# Altium PCB Motor_control.PcbDoc
Units mil, origin at the board's own origin, x right, y up, seen from the top; angles counter-clockwise.
Board outline 3543.31 x 3543.31 mil, 2 copper layers (Top Layer, Bottom Layer); 85 components, 65 nets, 315 pads, 62 vias.
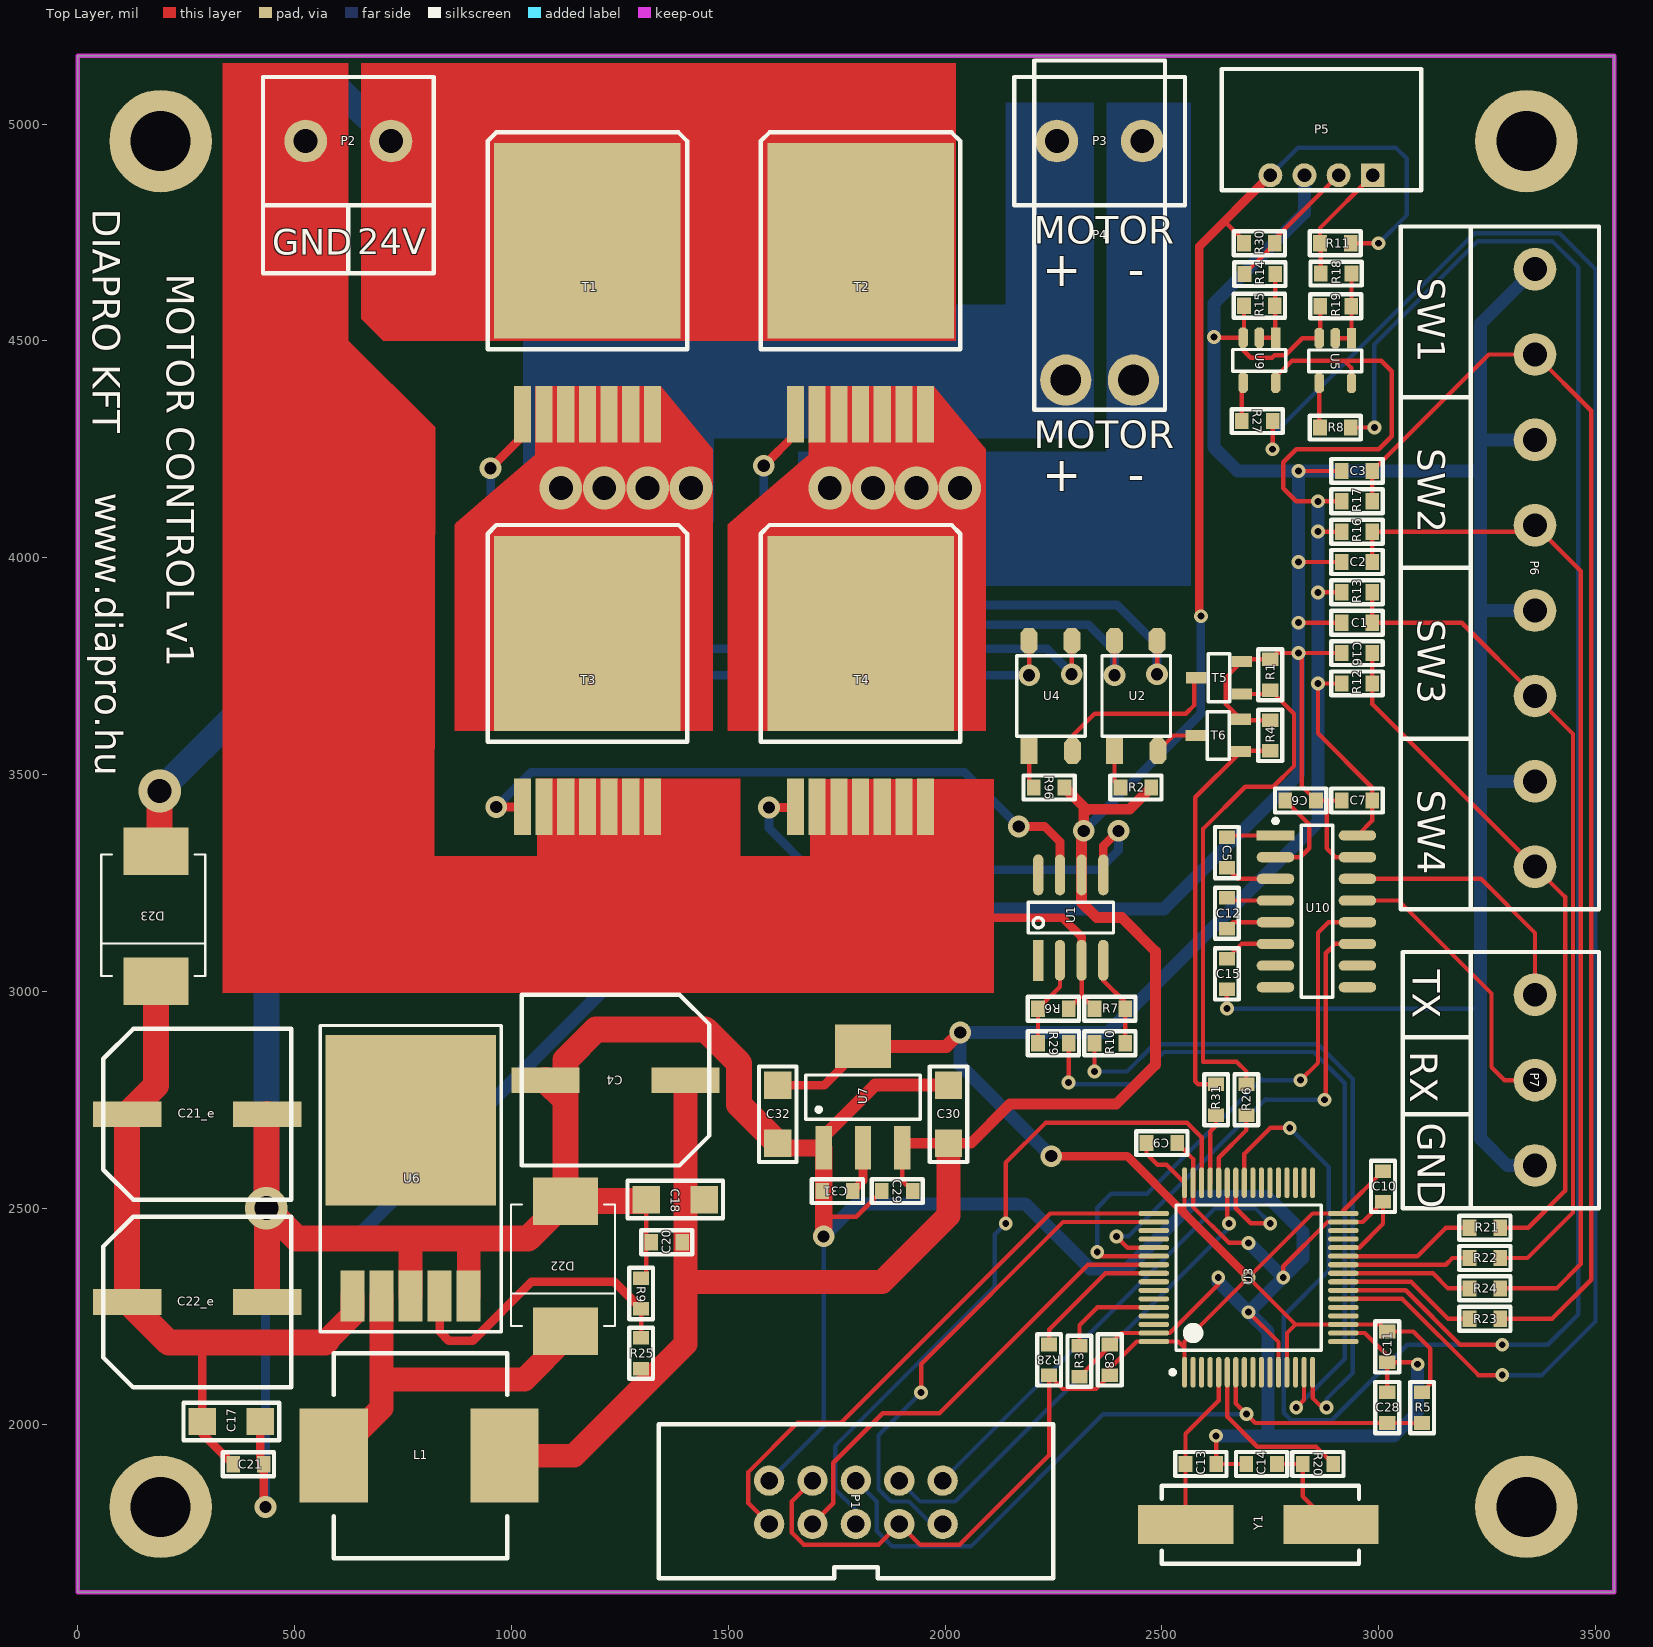
[diagram p0: Top Layer view]
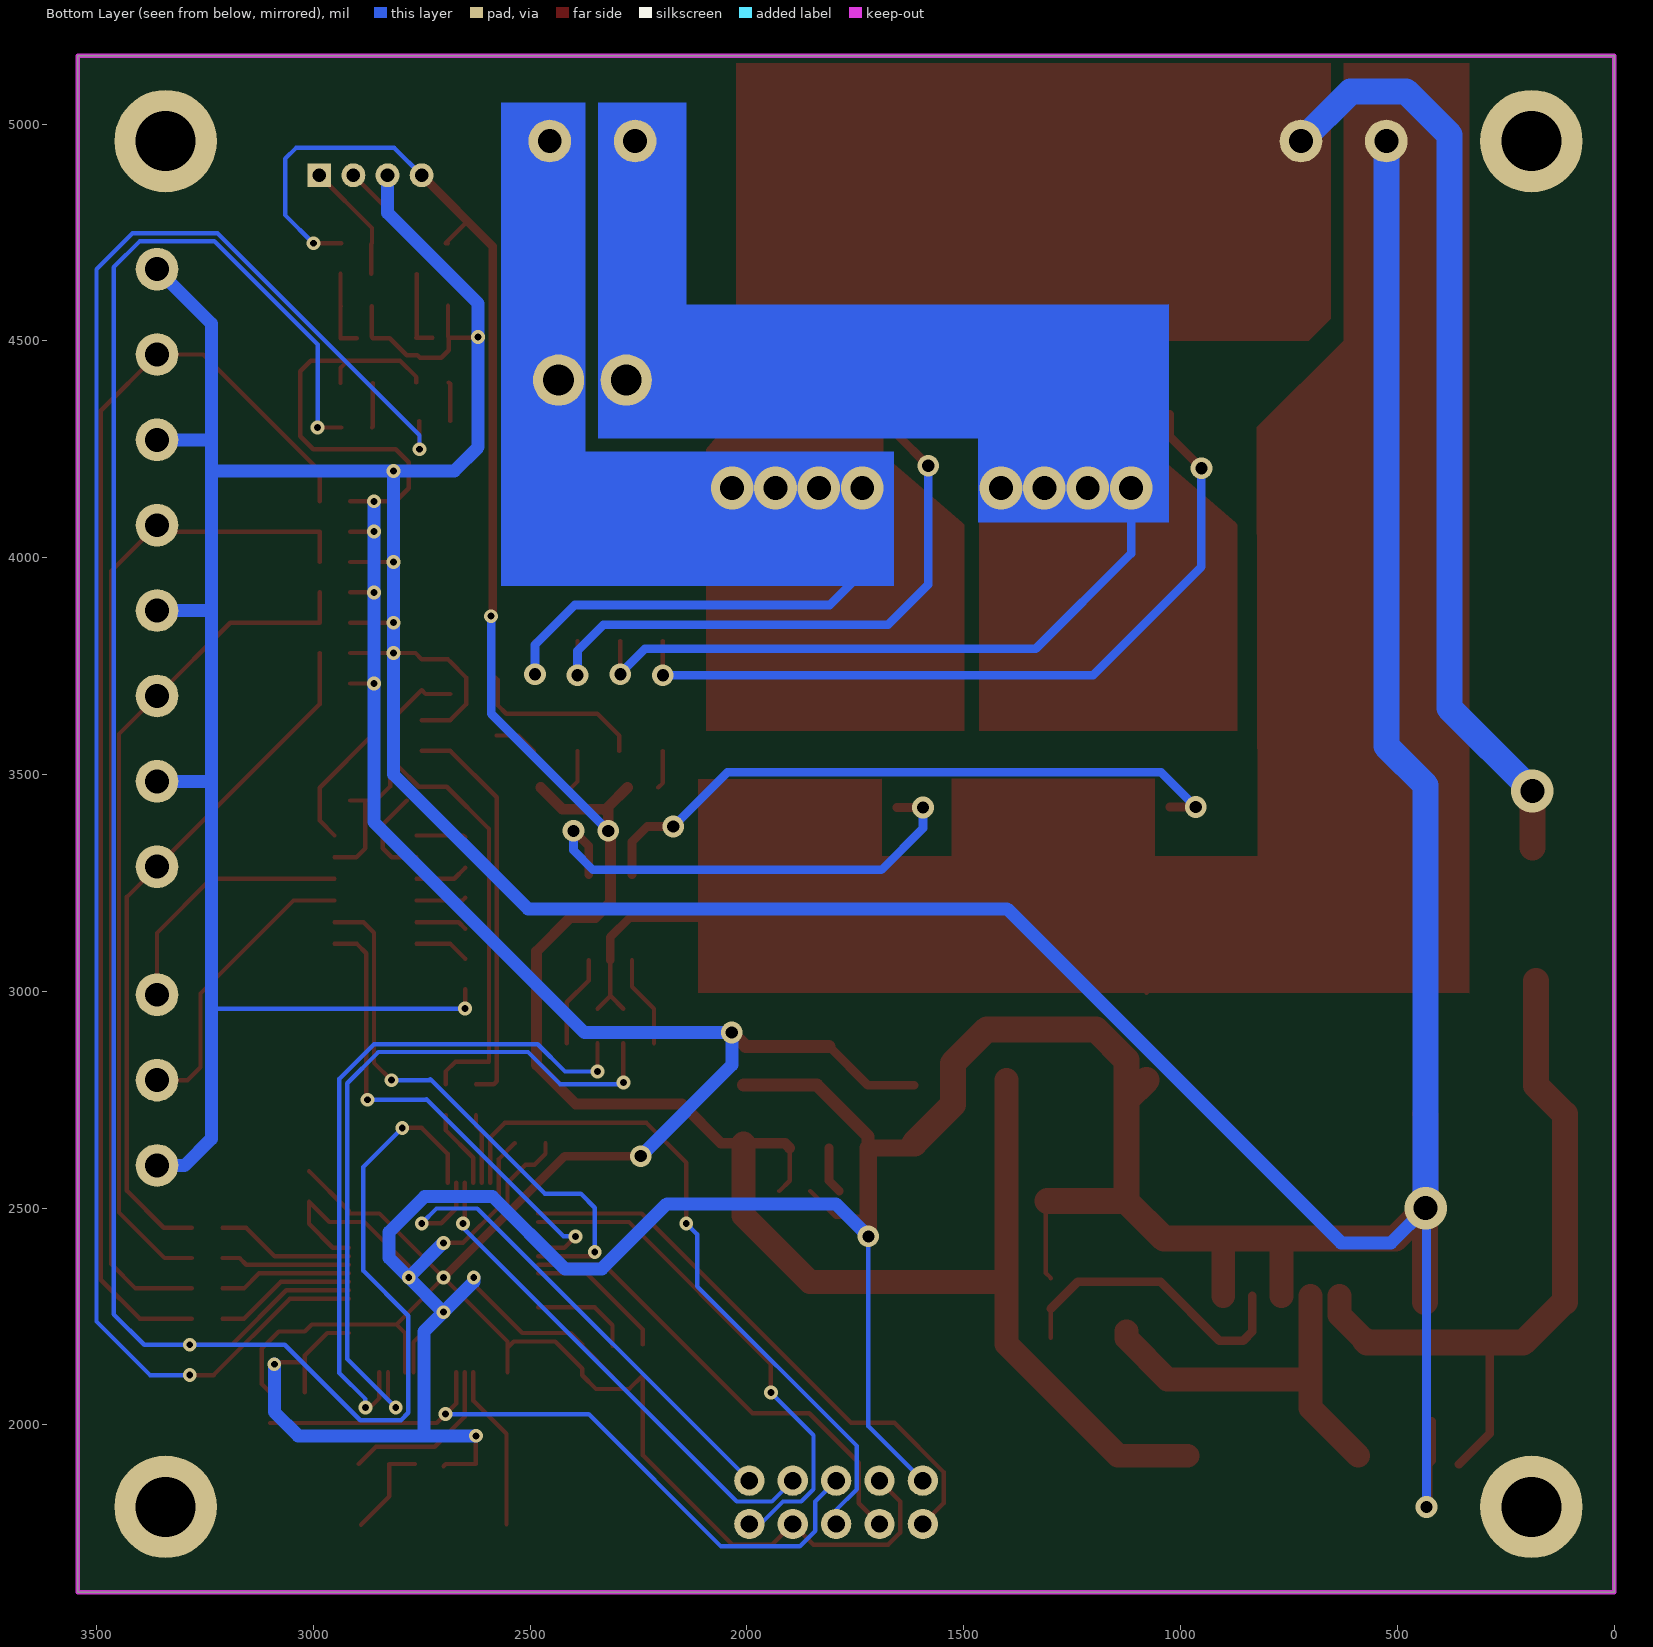
[diagram p1: Bottom Layer view, seen from below]

## Layer stack, top to bottom
Top Layer: signal copper 1.4
Dielectric: dielectric 12.6, FR-4, Dk 4.8
Bottom Layer: signal copper 1.4

## Board outline
0,1614.17 3543.31,1614.17 3543.31,5157.48 0,5157.48

## Design rules (kind name [scope] priority, off if disabled: settings)
Clearance Clearance_to_uc [HasFootprint('LQFP64_N') vs HasFootprint('LQFP64_N')] p1: gap=4
Clearance [All] p2: gap=8
MinimumSolderMaskSliver MinimumSolderMaskSliver_to_IC [HasFootprint('LQFP64_N') vs HasFootprint('LQFP64_N')] p1: minsoldermaskwidth=0
MinimumSolderMaskSliver [All] p2: minsoldermaskwidth=10
PolygonConnect [All] p1: connectstyle=Relief reliefconductorwidth=10 reliefentries=4 polygonreliefangle="90 Angle"
RoutingVias [All] p1: holewidth=16 width=32 viastyle="Through Hole" minholewidth=16 minwidth=32 maxholewidth=28 maxwidth=50
SilkToSilkClearance [All] p1: silktosilkclearance=0
SilkscreenOverComponentPads [All] p1: minsilkscreentomaskgap=0
SolderMaskExpansion [All] p1: expansion=4
Width [All] p1: maxlimit=100 minlimit=10 preferedwidth=10
25 further rules are at their usual default settings.

## Components (designator, comment, footprint, x,y, rotation, side; value= is the part's Value field where it differs from the comment)
C1 "100nF" FP_0603_CAP_080 2950,3850 r0 top
C2 "100nF" FP_0603_CAP_080 2950,3990 r0 top
C3 "100nF" FP_0603_CAP_080 2950,4200 r0 top
C4 "1000uF 10V" CAP_ALU_ELKO_10D_10,5H 1240.16,2795.28 r180 top
C5 "100nF" FP_0603_CAP_080 2650,3320 r270 top
C6 "100nF" FP_0603_CAP_080 2820,3440 r180 top
C7 "100nF" FP_0603_CAP_080 2950,3440 r0 top
C8 "100nF" FP_0603_CAP_080 2380,2150 r270 top
C9 "100nF" FP_0603_CAP_080 2500,2650 r180 top
C10 "100nF" FP_0603_CAP_080 3010,2550 r90 top
C11 "100nF" FP_0603_CAP_080 3020,2180 r90 top
C12 "100nF" FP_0603_CAP_080 2650,3180 r90 top
C13 "22p" FP_0603_CAP_080 2590,1910 r180 top
C14 "22p" FP_0603_CAP_080 2730,1910 r180 top
C15 "100nF" FP_0603_CAP_080 2650,3040 r90 top
C16 "100nF" FP_0603_CAP_080 2950,3780 r0 top
C17 "47uF" FP_1206_CAP_125 354.33,2007.87 r180 top
C18 "47uF" FP_1206_CAP_125 1377.95,2519.68 r0 top
C20 "100nF" FP_0603_CAP_080 1358.27,2421.26 r180 top
C21 "100nF" FP_0603_CAP_080 393.7,1909.45 r0 top
C21_e "220uF 50V" CAP_ALU_ELKO_10D_10,5H 275.59,2716.54 r0 top
C22_e "220uF 50V" CAP_ALU_ELKO_10D_10,5H 275.59,2283.46 r0 top
C28 "100nF" FP_0603_CAP_080 3020,2040 r90 top
C29 "100nF" FP_0603_CAP_080 1889.76,2539.37 r0 top
C30 "10uF" FP_1206_CAP_085 2007.87,2716.54 r90 top
C31 "100nF" FP_0603_CAP_080 1751.97,2539.37 r180 top
C32 "10uF" FP_1206_CAP_085 1614.17,2716.54 r90 top
D22 "SS36" DIODE_SMC 1122.05,2362.2 r270 top
D23 "SS36" DIODE_SMC 177.17,3169.29 r270 top
L1 "100uH" SRR1206_T 787.4,1929.13 r0 top
P1 "Header 5X2" HEADER_10_BOX 1594.49,1771.65 r0 top
P2 "Header 2" "Sorkapocs 2P 5mm" 624.13,4960.63 r0 top
P3 "Motor" "Sorkapocs 2P 5mm" 2356.42,4960.63 r0 top
P4 "Motor" "3.96mm 2P  90° NCW396-02R" 2356.42,4409.45 r0 top
P5 "Header 4" jst-s4b-xh-a 2868.23,4881.89 r0 top
P6 "Header 8" "Sorkapocs 8P 5mm" 3360.35,3976.38 r270 top
P7 "Header 3" "Sorkapocs 3P 5mm" 3360.35,2795.28 r270 top
R1 "47k" FP_0603_RES 2750,3730 r90 top
R2 "330" FP_0603_RES 2440,3470 r0 top
R3 "47k" FP_0603_RES 2310,2147 r90 top
R4 "47k" FP_0603_RES 2750,3590 r90 top
R5 "47k" FP_0603_RES 3100,2040 r90 top
R6 "47k" FP_0603_RES 2250,2960 r180 top
R7 "47k" FP_0603_RES 2380,2960 r0 top
R8 "1k" FP_0603_RES 2900,4300 r0 top
R9 "1k" FP_0603_RES 1299.21,2303.15 r270 top
R10 "1k" FP_0603_RES 2380,2880 r180 top
R11 "1k" FP_0603_RES 2900,4725 r0 top
R12 "47k" FP_0603_RES 2950,3710 r180 top
R13 "47k" FP_0603_RES 2950,3920 r180 top
R14 "1k" FP_0603_RES 2726,4654 r180 top
R15 "47k" FP_0603_RES 2725,4581 r180 top
R16 "47k" FP_0603_RES 2950,4060 r180 top
R17 "47k" FP_0603_RES 2950,4130 r180 top
R18 "1k" FP_0603_RES 2902,4655 r180 top
R19 "47k" FP_0603_RES 2901,4580 r180 top
R20 "390R" FP_0603_RES 2860,1910 r0 top
R21 "1k" FP_0603_RES 3245,2455 r0 top
R22 "1k" FP_0603_RES 3245,2385 r0 top
R23 "1k" FP_0603_RES 3245,2245 r0 top
R24 "1k" FP_0603_RES 3245,2315 r0 top
R25 "3k9" FP_0603_RES 1299.21,2165.35 r90 top
R26 "1k" FP_0603_RES 2695,2750 r90 top
R27 "1k" FP_0603_RES 2720,4315 r0 top
R28 "47k" FP_0603_RES 2240,2150 r270 top
R29 "1k" FP_0603_RES 2250,2880 r0 top
R30 "1k" FP_0603_RES 2725,4725 r180 top
R31 "1k" FP_0603_RES 2625,2750 r90 top
R96 "330" FP_0603_RES 2240,3470 r0 top
T1 "IRFS7730PBF" FET_D2-PAK_7 1175.31,4330.71 r0 top
T2 "IRFS7730PBF" FET_D2-PAK_7 1805.24,4330.71 r0 top
T3 "IRFS7730PBF" FET_D2-PAK_7 1175.31,3425.2 r0 top
T4 "IRFS7730PBF" FET_D2-PAK_7 1805.24,3425.2 r0 top
T5 "PMBF170" FET_SOT23 2632.04,3723.03 r0 top
T6 "PMBF170" FET_SOT23 2630,3590 r0 top
U1 "TC4427" DIGITAL_SOIC8 2290,3170 r90 top
U2 "VOM1271T" OPTO_SOP-4 2440.94,3681.1 r90 top
U3 "STM32F103RET6" LQFP64_N 2700,2340 r90 top
U4 "VOM1271T" OPTO_SOP-4 2244.09,3681.1 r90 top
U5 "SN74AHC1G08" GATE_SOT23-5 2900.03,4453.95 r270 top
U6 "TS2576CM5-ADJ" "SUPPLY_TO-263 5" 767.72,2500 r0 top
U7 "LD1117xx" SUPPLY_SOT223 1811.02,2755.91 r90 top
U9 "SN74AHC1G08" GATE_SOT23-5 2725,4455 r270 top
U10 "MAX3232CSE" DIGITAL_SOIC16 2856.54,3184.33 r90 top
Y1 "8MHz Quartz HC49" FP_CRYSTAL_HC49_SMD 2890,1770 r180 top

## Footprints (in the part's own frame and the unit in brackets; to place one, negate y for a bottom-side part, rotate by r counter-clockwise, add the part's x,y. Pads: shape width x height; smd on the part's side, far side on the other; paste and mask are expansions set on the pad)
"3.96mm 2P  90° NCW396-02R" [mm]
  round 3 hole 1.8: 1(1.98,0) 2(-1.98,0)
  silkscreen extent -3.84,-1.73 3.84,18.72, body extent -3.96,-0.53 3.96,18.84, height 3.6
CAP_ALU_ELKO_10D_10,5H [mm]
  rect 4x1.5 smd: N(4.1,0) P(-4.1,0)
  silkscreen extent -5.5,-5 5.5,5, body extent -5.65,-5.15 5.65,5.15, height 10.8
DIGITAL_SOIC8 [mm]
  rect 2.4x0.6 smd: 1(-2.5,1.905)
  oval 2.4x0.6 smd: 2(-2.5,0.635) 3(-2.5,-0.635) 4(-2.5,-1.905) 5(2.5,-1.905) 6(2.5,-0.635) 7(2.5,0.635) 8(2.5,1.905)
  silkscreen extent -0.9,-2.5 0.9,2.5, body extent -3.03,-2.5 3.03,2.5, height 1.9
DIGITAL_SOIC16 [mm]
  rect 0.6x2.2 smd: 1(4.445,2.4)
  oval 0.6x2.2 smd: 2(3.175,2.4) 3(1.905,2.4) 4(0.635,2.4) 5(-0.635,2.4) 6(-1.905,2.4) 7(-3.175,2.4) 8(-4.445,2.4) 9(-4.445,-2.4) 10(-3.175,-2.4) 11(-1.905,-2.4) 12(-0.635,-2.4) 13(0.635,-2.4) 14(1.905,-2.4) 15(3.175,-2.4) 16(4.445,-2.4)
  silkscreen extent -5.03,-0.97 5.42,2.52, body extent -4.95,-3 4.95,3, height 1.4
DIODE_SMC [mil]
  rect 110x150 smd: A(-154,3) K(146,3)
  silkscreen extent -146,-123 134,117, body extent -157,-117 157,117, height 91
FET_D2-PAK_7 [mil] "D2PAK (TO-263) 2Lead"
  rect 430x450 smd: D(0,400)
  rect 39.37x130 smd: G(-150,0) S(-100,0) S(-50,0) S(0,0) S(50,0) S(100,0) S(150,0)
  silkscreen extent -230,150 230,650, body extent -205,-30 205,587, height 177
FET_SOT23 [mm] "SOT23-3 tok"
  rect 1.2x0.65 smd: D(-1.327,0) G(1.327,-0.95) S(1.327,0.95)
  silkscreen extent -0.64,-1.4 0.64,1.4, body extent -1.27,-1.46 1.27,1.46, height 0.97
FP_0603_CAP_080 [mm] "0.8mm magas 0603 kapacitás"
  rect 0.8x0.95 smd: 1(-0.9,0) 2(0.9,0)
  silkscreen extent -1.5,-0.7 1.5,0.7, body extent -0.8,-0.4 0.76,0.4, height 0.8
FP_0603_RES [mm] "0603 ellenállás"
  rect 0.8x0.95 smd: 1(-0.9,0) 2(0.9,0)
  silkscreen extent -1.5,-0.7 1.5,0.7, body extent -0.8,-0.4 0.8,0.4, height 0.44
FP_1206_CAP_085 [mm] "1206 kapacitás 0.85 mm"
  rect 1.6x1.6 smd: 1(-1.7,0) 2(1.7,0)
  silkscreen extent -2.8,-1.1 2.8,1.1, body extent -1.52,-0.79 1.58,0.79, height 0.85
FP_1206_CAP_125 [mm] "1206 kapacitás 1.25 mm"
  rect 1.6x1.6 smd: 1(-1.7,0) 2(1.7,0)
  silkscreen extent -2.8,-1.1 2.8,1.1, body extent -1.52,-0.79 1.58,0.79, height 1.25
FP_CRYSTAL_HC49_SMD [mil] "HC49/SMD"
  rect 220x90 smd: 1(0,0) 2(334.65,0)
  silkscreen extent -65,-90 390,90, body extent -82,-90 407,90, height 130
GATE_SOT23-5 [mm] "SOT23, 5-Leads, Body 2.9x1.6mm, Pitch 0.95mm, Lead Span 2.8mm, IPC Medium Density"
  rect 1.2x0.55 smd mask+0.05: 1(-1.327,0.95)
  oct 1.2x0.55 smd mask+0.05: 2(-1.327,0) 3(-1.327,-0.95) 4(1.3,-0.95) 5(1.3,0.95)
  silkscreen extent -0.64,-1.55 0.64,1.55, body extent -1.17,-1.46 1.17,1.46, height 1
HEADER_10_BOX [mil]
  round 70 hole 40: 1(0,0) 2(0,100) 3(100,0) 4(100,100) 5(200,0) 6(200,100) 7(300,0) 8(300,100) 9(400,0) 10(400,100)
  silkscreen extent -255,-125 655,230, body extent -198,-130 598,240, height 346
jst-s4b-xh-a [mm]
  rect 1.4x1.4 hole 0.8: 1(3,0)
  round 1.4 hole 0.8: 2(1,0) 3(-1,0) 4(-3,0)
  silkscreen extent -5.84,-0.89 5.84,6.22, body extent -5.97,-0.25 5.97,6.35, height 5
LQFP64_N [mm] "Thin QFP, 64-Leads, Body 10x10mm, Pitch 0.5mm, IPC Medium Density"
  oval 1.8x0.3 smd: 1(-5.55,3.75) 2(-5.55,3.25) 3(-5.55,2.75) 4(-5.55,2.25) 5(-5.55,1.75) 6(-5.55,1.25) 7(-5.55,0.75) 8(-5.55,0.25) 9(-5.55,-0.25) 10(-5.55,-0.75) 11(-5.55,-1.25) 12(-5.55,-1.75) 13(-5.55,-2.25) 14(-5.55,-2.75) 15(-5.55,-3.25) 16(-5.55,-3.75) 33(5.55,-3.75) 34(5.55,-3.25) 35(5.55,-2.75) 36(5.55,-2.25) 37(5.55,-1.75) 38(5.55,-1.25) 39(5.55,-0.75) 40(5.55,-0.25) 41(5.55,0.25) 42(5.55,0.75) 43(5.55,1.25) 44(5.55,1.75) 45(5.55,2.25) 46(5.55,2.75) 47(5.55,3.25) 48(5.55,3.75)
  oval 0.3x1.8 smd: 17(-3.75,-5.55) 18(-3.25,-5.55) 19(-2.75,-5.55) 20(-2.25,-5.55) 21(-1.75,-5.55) 22(-1.25,-5.55) 23(-0.75,-5.55) 24(-0.25,-5.55) 25(0.25,-5.55) 26(0.75,-5.55) 27(1.25,-5.55) 28(1.75,-5.55) 29(2.25,-5.55) 30(2.75,-5.55) 31(3.25,-5.55) 32(3.75,-5.55) 49(3.75,5.55) 50(3.25,5.55) 51(2.75,5.55) 52(2.25,5.55) 53(1.75,5.55) 54(1.25,5.55) 55(0.75,5.55) 56(0.25,5.55) 57(-0.25,5.55) 58(-0.75,5.55) 59(-1.25,5.55) 60(-1.75,5.55) 61(-2.25,5.55) 62(-2.75,5.55) 63(-3.25,5.55) 64(-3.75,5.55)
  silkscreen extent -5.67,-4.25 4.25,4.57, body extent -5,-5 5,5, height 1.6
OPTO_SOP-4 [mm]
  rect 1.5x1 smd: 1(-3.222,1.275)
  oct 1.5x1 smd: 2(-3.222,-1.275) 3(3.222,-1.225) 4(3.222,1.275)
  silkscreen extent -2.36,-2.01 2.36,2.01, body extent -3.43,-2 3.43,2, height 2.02
"Sorkapocs 2P 5mm" [mm]
  round 2.5 hole 1.4: 1(-2.5,0) 2(2.5,0)
  silkscreen extent -5,-3.75 5,3.75, body extent -5,-4.5 5,4.5, height 15.2
"Sorkapocs 3P 5mm" [mm]
  round 2.5 hole 1.4: 1(-5,0) 2(0,0) 3(5,0)
  silkscreen extent -7.5,-3.75 7.5,3.75, body extent -7.5,-4.5 7.5,4.5, height 15.2
"Sorkapocs 8P 5mm" [mm]
  round 2.5 hole 1.4: 1(-17.5,0) 2(-12.5,0) 3(-7.5,0) 4(-2.5,0) 5(2.5,0) 6(7.5,0) 7(12.5,0) 8(17.5,0)
  silkscreen extent -20,-3.75 20,3.75, body extent -20,-4.5 20,4.5, height 15.2
SRR1206_T [mm] "POWER INDUCTOR"
  rect 4x5.5 smd: 1(-5,0) 2(5,0)
  silkscreen extent -5,-6 5.16,6, body extent -5.97,-5.97 6.23,6.23, height 6
SUPPLY_SOT223 [mm] "SOT223 package, 3 leads"
  rect 2.55x0.95 smd: 1(-2.975,2.3) 2(-2.975,0) 3(-2.975,-2.3)
  rect 2.55x3.3 smd: 2(2.975,0)
  silkscreen extent -1.3,-3.35 1.3,3.35, body extent -3.5,-3.25 3.5,3.25, height 1.65
"SUPPLY_TO-263 5" [mm]
  rect 1.4x3 smd: 1(-3.4,-5.15) 2(-1.7,-5.15) 3(0,-5.15) 4(1.7,-5.15) 5(3.4,-5.15)
  rect 10x10 smd: 6(0,5.15)
  silkscreen extent -5.3,-7.25 5.3,10.7, body extent -5.08,-6.02 5.08,8.62, height 4.57

## Part data
C1 C2 C3 C13 C14 C16 C17 C18 C20 C21 C28 C29 C30 C31 C32: library part Cap, "Capacitor"
C4 C21_e C22_e: library part "Cap Pol1", "Polarized Capacitor (Radial)"
C5 C6 C7 C8 C9 C10 C11 C12 C15: library part CAP, "Capacitor"
D22 D23: library part SCHOTTKY, "NXP - PMEG3020EJ,115 - SCHOTTKY RECT 30V 2A SOD323F"
L1: library part Inductor, "Inductor"
P1: "Header, 5-Pin, Dual row"
P2: "Header, 2-Pin"
P3 P4: library part "Header 2", "Header, 2-Pin"
P5: "Header, 4-Pin"
P6: "Header, 8-Pin"
P7: "Header, 3-Pin"
R1 R2 R3 R4 R5 R6 R7 R8 R9 R10 R11 R12 R13 R14 R15 R16 R17 R18 R19 R21 R22 R23 R24 R25 R26 R27 R28 R29 R30 R31 R96: library part Res3, "Resistor"
R20: library part RES, "Resistor"
T1 T2 T3 T4 T5 T6: library part NMOS
U1: "1.5A Dual High-Speed Power MOSFET Driver"
U2 U4: "Photodiode Output Optocouplers MOSFET DRVR ISOLATED SOP4"
U3: library part STM32F103RBT6, "STM32 ARM-based 32-bit MCU with 256 Kbytes Flash, 64-pin LQFP, Industrial Temperature"
U5 U9: "1x2-INPUT AND-GATE"
U6: library part TS2576, "Step Down DC-DC Converter"
U7: "LD1117xx 3,3V lin reg"
U10: "MAX3232CSE 3.3.V RS232 converter"
Y1: library part "XTAL HC49", "Standard HC49 quartz"

## Free pads (board coordinates)
  round 236.22 hole 137.8: 0(191.06,1811.02) 0(191.06,4960.63) 0(3340.67,4960.63) 0(3340.67,1811.02)

## Via types
v1: diameter 32, hole 16, Top Layer to Bottom Layer, 37 vias
v2: diameter 50, hole 28, Top Layer to Bottom Layer, 15 vias
v3: diameter 98.43, hole 55.12, Top Layer to Bottom Layer, 10 vias

## Nets (pads, with @x,y where several pads share a name; then routed paths per layer and width w, separated by ;. In a path a pad name is that pad's centre, name@x,y a point inside that pad or via, vN(x,y) a via of type N, cw(c..) or ccw(c..) an arc to the next point about the centre after c; other vN are vias at no path point)
3V3: C7.2 C8.2 C9.2 C10.2 C11.2 C31.1 C32.2 P1.4 P1.7 R5.2 R12.2 R13.2 R16.2 R17.2 R28.2 U3.1 U3.13 U3.19 U3.32 U3.48 U3.64 U5.5 U7.2 U9.5 U10.16 | length 7925.8
  Top Layer w10: P1.4 1646.49,1823.65 1646.49,1751.77 1674.61,1723.65 1846.49,1723.65 P1.7 1942.49,1723.65 2033.65,1723.65 2240,1930 R28.2 2271.75,2082.82 2348.25,2082.82 C8.2 2380,2130 2442.36,2192.36 U3.64 2537.64,2192.36 2552.36,2177.64 ; C9.2 2464.57,2625.43 2490,2600 2510.87,2600 U3.48 2552.36,2487.64 ; U3.1 2552.36,2177.64 ; U9.5 2762.4,4416.4 2800,4454 2921,4454 ; U3.13 2788.58,2212.05 2808.27,2231.73 ; v1(2860,3920) R13.2 ; v1(2860,4060) R16.2 ; R12.2 v1(2860,3710) 2860,3595 2985.43,3469.57 C7.2 2985.43,3393.74 U10.16 ; R17.2 v1(2860,4130) 2810,4130 2780,4160 2780,4220 2810,4250 3000,4250 3030,4280 3030,4430 3006,4454 2921,4454 ; U5.5 2937.43,4437.57 2921,4454 ; C10.2 2918.5,2493.94 U3.32 2847.64,2487.64 v1(2700,2340) ; R5.2 3119,2094.43 3119,2176 3079.57,2215.43 C11.2 3003.7,2231.73 U3.19 2808.27,2231.73 ; 2552.36,2177.64 2552.36,2192.36 v1(2700,2340) ; v1(2700,2340) 2808.27,2231.73
  Top Layer w20: C32.2 1721.46,2783.46 U7.2@1811.02,2873.03 ; C31.1 1811.02,2562.99 U7.2@1811.02,2638.78 ; v2(2245,2620) 2420,2620 2552.36,2487.64 v1(2700,2340)
  Top Layer w30: U7.2@1811.02,2873.03 2003.03,2873.03 v2(2035,2905)
  Bottom Layer w30: v2(2245,2620) 2035,2830 v2(2035,2905) 2375,2905 2860,3390 v1(2860,3710) v1(2860,3920) v1(2860,4060) v1(2860,4130)
6V: C4.P C18.2 C20.1 C29.2 C30.1 L1.2 P5.4 R2.2 R11.2 R25.1 R30.2 R96.2 U1.6 U7.3 | length 6912.5
  Top Layer w10: U7.3 1901.57,2562.99 C29.2 ; v1(2590,3865) 2591,3866 2591,4691 ; 2650,4770 2695,4725 R30.2 ; R11.2 v1(3000,4725)
  Top Layer w20: v1(2590,3865) 2586,3869 2586,4717.77 P5.4
  Top Layer w25: U7.3 1912.4,2649.61 C30.1 2059.61,2649.61 2150,2740 2395,2740 2485,2830 2485,3092.5 2407.5,3170 2350,3170 2315,3205 U1.6 2315,3365 v2(2320,3370) 2320,3410 ; R96.2 2320,3425.43 2320,3410 ; R2.2 2425.43,3420 2330,3420 2320,3410
  Top Layer w55: L1.2 1144.13,1929.13 1401.57,2186.57 1401.57,2330 ; C4.P 1401.57,2330 ; C30.1 2007.87,2482.87 1855,2330 1401.57,2330
  Bottom Layer w10: P5.4 2813.23,4945 3040,4945 3065,4920 3065,4790 v1(3000,4725)
  Bottom Layer w20: v2(2320,3370) 2590,3640 v1(2590,3865)
24V: D23.A P2.2 T1.D T2.D | length 2165.8
  Top Layer w10: D23.A D23.A@189,3332.13
  Top Layer w60: D23.A@189,3332.13 v3(189,3462)
  Bottom Layer w60: v3(189,3462) 380,3653 380,4975 480,5075 608.19,5075 P2.2
BOOT0: R3.2 U3.60 | length 236.1
  Top Layer w10: R3.2 2310,2230 2351.1,2271.1 U3.60
ENC_A: R27.1 U9.4 | length 90.1
  Top Layer w10: R27.1 2684.57,4400.79 U9.4
ENC_B: R8.1 U5.4 | length 103.6
  Top Layer w10: U5.4 2862.63,4301.94 R8.1
ENCODER_1: P5.2 R14.2 R30.1 | length 328.6
  Top Layer w10: R14.2@2690.57,4664.86 R14.2 2760.43,4723.87 R30.1 2760.43,4734.72 P5.2
ENCODER_2: P5.1 R11.1 R18.2 | length 278.2
  Top Layer w10: R18.2 2866.57,4723 R11.1 2864.57,4760.12 P5.1
FET_A: T3.G U1.7 | length 1537.4
  Top Layer w10: T3.G T3.G@1026.51,3426.39
  Top Layer w20: v2(965.28,3425.2) T3.G ; v2(2170,3380) 2230,3380 2265,3345 U1.7
  Bottom Layer w20: v2(965.28,3425.2) 1045.08,3505 2045,3505 v2(2170,3380)
FET_B: T4.G U1.5 | length 1135.2
  Top Layer w10: T4.G@1654.04,3424 T4.G
  Top Layer w20: v2(1594,3424) T4.G@1654.04,3424 ; U1.5 2365,3335 v2(2400,3370)
  Bottom Layer w20: v2(1594,3424) 1594,3376 1690,3280 2355,3280 2400,3325 v2(2400,3370)
FET_C: R1.1 R26.2 T5.G | length 1212.5
  Top Layer w10: T5.G 2741.06,3685.63 R1.1 2804.57,3640 2804.57,3519.57 2756.7,3471.7 2692.16,3471.7 2595,3374.54 2595,2837.73 2672.27,2837.73 2695,2815 R26.2
FET_D: R4.1 R31.2 T6.G | length 923.2
  Top Layer w10: R31.2 2584.11,2785.43 2577,2792.54 2577,3447.35 T6.G 2684.21,3554.57 R4.1
GND: C1.1 C2.1 C3.1 C4.N C6.1 C7.1 C8.1 C9.1 C10.1 C11.1 C13.1 C14.2 C15.1 C16.1 C17.1 C18.1 C20.2 C21.2 C21_e.N C22_e.N C28.2 C29.1 C30.2 C31.2 C32.1 D22.A P1.2 P2.1 P5.3 P6.1 P6.3 P6.5 P6.7 P7.3 R1.2 R3.1 R4.2 R6.1 R7.1 R9.1 R15.2 R19.2 T3.S T4.S T5.S T6.S U1.3 U3.12 U3.18 U3.28 U3.31 U3.47 U3.63 U5.3 U6.3 U6.5 U7.1 U9.3 U10.15 | length 22854.2
  Top Layer w10: 765,2421.26 901.57,2421.26 ; 1062.99,3011.81 1078.74,2996.06 ; R9.1 1311.02,2350.39 C18.1 C18.1@1307.54,2516.2 ; C31.2 1712.6,2535.43 1712.6,2500 1720.47,2492.13 1732.28,2480.32 1795.28,2480.32 C29.1 ; R6.1 2315,2989.57 ; R3.1 2380,2181.57 C8.1 2406.61,2212.05 U3.63 2518.07,2212.05 2630,2323.97 v1(2630,2340) ; U1.3 2315,2989.57 ; R7.1 2315,2989.57 ; C9.1 2572.05,2613.39 U3.47 2572.05,2502.95 2655,2420 v1(2700,2420) ; v1(2620,4509) 2621.76,4507.24 U9.3 ; v1(2625,1975) 2625.43,1974.57 C13.1 C14.2 C14.2@2700,1904.57 ; v1(2650,2960) C15.1 ; R15.2 2689.57,4509.21 U9.3 ; v1(2700,2260) 2768.9,2191.1 U3.12 ; R4.2 2684.21,3625.43 T6.S 2647.66,3661.99 2647.66,3723.81 T5.S 2689.28,3765.43 R1.2 2764.57,3780 v1(2815,3780) ; v1(2780,2340) 2780,2366.03 2881.92,2467.95 U3.31 2963.39,2467.95 C10.1 3010,2463.81 2955.08,2408.9 U3.28 ; v1(2815,3850) C1.1 ; v1(2815,3990) C2.1 ; v1(2815,4200) C3.1 ; R19.2 2865.57,4509.13 U5.3 2823.91,4506.19 2784.72,4467 2760,4467 2754,4461 2705,4461 2687.6,4478.4 U9.3 ; C7.1 2880,3440 ; C16.1 v1(2815,3780) ; U3.18 2967.95,2212.05 3020,2160 C11.1 ; U10.15 2900.67,3309.33 2880,3330 2880,3440 ; C28.2 C11.1 ; v1(3090,2140) 3085.43,2144.57 C11.1 ; v1(2815,3780) 2823,3772 2823,3472.43 C6.1 2880,3440
  Top Layer w20: C17.1 421.26,1917.32 C21.2 429.13,1814.96 v2(433.07,1811.02) ; 2095,3170 2270,3170 2315,3125 U1.3
  Top Layer w30: C32.1 C32.1@1625,2638.78 ; U7.1 1720.47,2665.35 1838.58,2783.46 C30.2
  Top Layer w40: C32.1@1625,2638.78 U7.1 1720.47,2492.13 1720.47,2440.47 1715,2435 v2(1720,2435)
  Top Layer w55: 765,2421.26 767.72,2418.54 U6.3 ; 900,2430 901.57,2428.43 901.57,2421.26 U6.5
  Top Layer w60: C22_e.N v3@437.01,2497.99 ; C21_e.N 435,2714.53 v3(435,2500) v3@437.01,2497.99 ; C4.N 1125.05,2748.97 ; C18.1@1307.54,2516.2 D22.A ; C32.1 1525,2738.78 1525,2833.86 1446.86,2912 1195.46,2912 1125.05,2841.58 1125.05,2748.97 ; v3@437.01,2497.99 505,2430 900,2430 1038.84,2430 D22.A ; D22.A 1125.05,2748.97
  Bottom Layer w10: P1.2 1720,1997.17 v2(1720,2435) ; v1(2650,2960) 3225,2960 3235,2970
  Bottom Layer w20: v2(433.07,1811.02) 433.07,2498.07 v3(435,2500)
  Bottom Layer w30: v3(435,2500) 515,2420 630,2420 1400,3190 2505,3190 2815,3500 v1(2815,3780) v1(2815,3850) v1(2815,3990) v1(2815,4200) ; v2(1720,2435) 1795,2510 2184.85,2510 2334.85,2360 2420,2360 2587,2527 2743.15,2527 2825,2445.15 2825,2385 v1(2780,2340) ; v1(2625,1975) 2745,1975 ; v1(2630,2340) 2630,2330 v1(2700,2260) ; v1(2700,2420) v1(2780,2340) ; P5.3 2828.86,4795 2620,4586.14 v1(2620,4509) 2620,4255 2675,4200 v1(2815,4200) ; v1(3090,2140) 3090,2030 3035,1975 2745,1975 ; P7.3 3296.57,2598.43 3235,2660 3235,2970 3235,3480 ; P6.7 3239.25,3484.25 3235,3480 ; P6.5 3237.95,3877.95 3235,3875 ; P6.3 3241.65,4271.65 3235,4265 ; P6.1 3235,4540 3235,4265 ; v1(2700,2260) v1(2780,2340) ; v1(2700,2260) 2745,2215 2745,1975 ; v1(2815,4200) 3235,4200 ; 3235,3480 3235,3875 ; 3235,3875 3235,4200 ; 3235,4200 3235,4265
  Bottom Layer w60: v3(435,2500) 435,3475 525.71,3565.71 P2.1
MOT_1: P3.1 P4.2 T1.S T3.D U4.3 | length 1522.2
  Top Layer w10: v2(2292,3731) 2292.32,3731.32 U4.3
  Bottom Layer w20: v3(1114.21,4160.47) 1114.21,4009.79 1334,3790 2235,3790 2292,3733 v2(2292,3731)
  other v3: 1214.21,4160.47 1314.21,4160.47 1414.21,4160.47
MOT_2: P3.2 P4.1 T2.S T4.D U2.3 | length 1163.6
  Top Layer w10: v2(2488.85,3731) 2489.17,3731.32 U2.3
  Bottom Layer w20: v3(1734.21,4160.47) 1755,4139.69 1755,3945 1809,3891 2397,3891 2488.85,3799.15 v2(2488.85,3731)
  other v3: 1834.21,4160.47 1934.21,4160.47 2034.21,4160.47
NetC5_1: C5.1 U10.1 | length 113.7
  Top Layer w10: C5.1 2653.9,3359.33 U10.1
NetC5_2: C5.2 U10.3 | length 122.5
  Top Layer w10: C5.2 2675.24,3259.33 U10.3
NetC6_2: C6.2 U10.2 | length 219.5
  Top Layer w10: U10.2 2819.33,3309.33 2840,3330 2840,3384.57 C6.2
NetC12_1: C12.1 U10.5 | length 118.2
  Top Layer w10: C12.1 2664.76,3159.33 U10.5
NetC12_2: C12.2 U10.4 | length 114.6
  Top Layer w10: C12.2 2656.1,3209.33 U10.4
NetC14_1: C14.1 R20.1 Y1.1 | length 226.2
  Top Layer w10: C14.1 R20.1 2824.57,1835.43 Y1.1
NetC15_2: C15.2 U10.6 | length 126.1
  Top Layer w10: C15.2 2683.9,3109.33 U10.6
NetC17_2: C17.2 C21.1 C21_e.P C22_e.P D23.K U6.1 | length 1708.1
  Top Layer w20: 275,2190 287.4,2177.6 C17.2 287.4,1980.32 C21.1
  Top Layer w55: 575,2195 633.86,2253.86 U6.1
  Top Layer w60: C22_e.P C21_e.P 180.17,2782.53 D23.K ; C22_e.P@116.54,2283.46 210,2190 275,2190 570,2190 575,2195
NetD22_K: D22.K L1.1 U6.2 | length 894
  Top Layer w55: L1.1 700.79,2039.37 700.79,2106.3 ; U6.2 700.79,2106.3 ; D22.K 1125.05,2200.05 1030.17,2105.17 701.92,2105.17 700.79,2106.3
NetR2_1: R2.1 U2.1 | length 90
  Top Layer w10: U2.1 2390.75,3483.82 R2.1
NetR8_2: R8.2 U3.23 U3.41 | length 5394.1
  Top Layer w10: U3.41 2690.16,2625.16 2750,2685 v1(2795,2685) ; U3.23 3062.37,2310.47 3187.84,2185 v1(3285,2185) ; R8.2 v1(2990,4300)
  Bottom Layer w10: v1(2795,2685) 2885,2595 2885,2356 2781,2252 2781,2027.99 2797.99,2011 2892.01,2011 3066.01,2185 v1(3285,2185) 3390,2185 3460,2255 3460,4670 3400,4730 3228.26,4730 2990,4491.74 v1(2990,4300)
NetR9_2: R9.2 R25.2 U6.4 | length 704.1
  Top Layer w10: R25.2 R9.2
  Top Layer w20: U6.4 834.65,2215.35 855.7,2194.3 910.7,2194.3 1046.4,2330 1236.93,2330 R9.2
NetR10_2: R10.2 U3.16 | length 1617.4
  Top Layer w10: v1(2344.57,2815) R10.2 ; U3.16 2847.64,2062.36 2880,2030 v1(2880,2040)
  Bottom Layer w10: v1(2344.57,2815) 2419.57,2815 2482.57,2878 2860,2878 2940,2798 2940,2120 2880,2060 v1(2880,2040)
NetR14_1: R14.1 R15.1 U9.1 U9.2 | length 184.6
  Top Layer w10: U9.2 U9.1 2761.43,4508.21 R14.1
NetR18_1: R18.1 R19.1 U5.1 U5.2 | length 187
  Top Layer w10: U5.2 U5.1 2937.43,4579 R19.1 2937.43,4581 R18.1
NetR21_1: R21.1 U3.27 | length 318.3
  Top Layer w10: U3.27 3089.21,2389.21 3155,2455 R21.1
NetR22_1: R22.1 U3.26 | length 297.5
  Top Layer w10: U3.26 3154.53,2369.53 3170,2385 R22.1
NetR23_1: R23.1 U3.24 | length 326.3
  Top Layer w10: U3.24 3074.84,2330.16 3160,2245 R23.1
NetR24_1: R24.1 U3.25 | length 305.5
  Top Layer w10: U3.25 3125.16,2349.84 3160,2315 R24.1
NetR26_1: R26.1 U3.44 | length 182.5
  Top Layer w10: U3.44 2631.1,2616.1 2695,2680 R26.1
NetR27_2: R27.2 U3.22 | length 4201.7
  Top Layer w10: v1(2755,4250) 2755.43,4250.43 R27.2 ; U3.22 3054.21,2290.79 3230,2115 v1(3285,2115)
  Bottom Layer w10: v1(2755,4250) 2755,4282.2 3220.8,4748 3417,4748 3500,4665 3500,2238.43 3376.57,2115 v1(3285,2115)
NetR29_2: R29.2 U3.15 | length 1672.6
  Top Layer w10: v1(2285,2790) 2285.43,2790.43 R29.2 ; v1(2810,2040) 2827.95,2057.95 U3.15
  Bottom Layer w10: v1(2285,2790) 2289,2786 2431,2786 2505,2860 2850,2860 2922,2788 2922,2152 v1(2810,2040)
NetR31_1: R31.1 U3.45 | length 161.7
  Top Layer w10: U3.45 2611.42,2676.42 2625,2690 R31.1
NetR96_1: R96.1 U4.1 | length 88.7
  Top Layer w10: U4.1 2193.9,3480.67 R96.1
NetT1_G: T1.G U4.4 | length 1806.6
  Top Layer w10: U4.4 2193.9,3729.1 v2(2194,3729)
  Top Layer w20: v2(952.08,4206.29) 1025.31,4279.53 T1.G
  Bottom Layer w20: v2(952.08,4206.29) 952.08,3978.92 1202,3729 v2(2194,3729)
NetT2_G: T2.G U2.4 | length 1430.4
  Top Layer w10: U2.4 2390.75,3729.1 v2(2390.85,3729)
  Top Layer w20: v2(1582,4212) 1655.24,4285.24 T2.G
  Bottom Layer w20: v2(1582,4212) 1582,3938 1675,3845 2331,3845 2390.85,3785.15 v2(2390.85,3729)
NetT5_D: T5.D U4.2 | length 410.1
  Top Layer w10: U4.2 2294.29,3589.29 2345,3640 2555,3640 2575,3660 2575,3718.24 T5.D
NetT6_D: T6.D U2.2 | length 101.4
  Top Layer w10: U2.2 2526.9,3590 T6.D
NRST: C28.1 P1.6 R5.1 U3.7 | length 1649.5
  Top Layer w10: U3.7 2670.47,2049.53 v1(2695,2025) 2715.43,2004.57 R5.1
  Bottom Layer w10: P1.6 1842.49,1823.65 1842.49,1755.77 1878.26,1720 2060,1720 2365,2025 v1(2695,2025)
NTRST: R28.1 U3.56 | length 329.8
  Top Layer w10: R28.1 2240,2220 2240.16,2220 2370,2349.84 U3.56
OSC32_IN: U3.3
OSC32_OUT: U3.4
OSC_IN: C13.2 U3.5 Y1.2 | length 382.4
  Top Layer w10: Y1.2@2554.57,1770.79 C13.2 2554.57,1979.57 2631.1,2056.1 U3.5
OSC_OUT: R20.2 U3.6 | length 392.2
  Top Layer w10: U3.6 2650.79,2019.21 2720,1950 2855.43,1950 R20.2
PROG_RX: P1.8 U3.43 | length 1161.3
  Top Layer w10: U3.43 2650.79,2469.21 v1(2655,2465)
  Bottom Layer w10: P1.8 1942.49,1823.65 2023.65,1823.65 2665,2465 v1(2655,2465)
PROG_TX: P1.10 U3.42 | length 1182.3
  Top Layer w10: U3.42 2670.47,2499.53 2705,2465 v1(2750,2465)
  Bottom Layer w10: P1.10 2621.83,2499 2716,2499 v1(2750,2465)
PWM_A: R6.2 R29.1 U1.2 | length 212.5
  Top Layer w10: R29.1 R6.2 2265,3010.43 U1.2
PWM_B: R7.2 R10.1 U1.4 | length 212.5
  Top Layer w10: U1.4 2365,3025 2415.43,2974.57 R7.2 R10.1
RS232RX: P7.2 U10.13 | length 680.6
  Top Layer w10: U10.13 3045.67,3209.33 3260,2995 3260,2825 3290,2795 3290.28,2795.28 P7.2
RS232TX: P7.1 U10.14 | length 603.5
  Top Layer w10: U10.14 3235.67,3259.33 3360.35,3134.65 P7.1
SWITCH_1: C16.2 P6.8 R12.1 R21.2 | length 1608.9
  Top Layer w10: C16.2 R12.1 2985.43,3662.32 P6.8 3430,3217.76 3430,2540 3345,2455 R21.2
SWITCH_2: C1.2 P6.6 R13.1 R22.2 | length 1953.3
  Top Layer w10: R13.1 C1.2 3191.46,3850 P6.6 3448,3593.46 3448,2490 3343,2385 R22.2
SWITCH_3: C2.2 P6.4 R16.1 R24.2 | length 2407.4
  Top Layer w10: C2.2 R16.1 3345.55,4060 P6.4 3466,3969.16 3466,2371 3410,2315 R24.2
SWITCH_4: C3.2 P6.2 R17.1 R23.2 | length 2990.2
  Top Layer w10: R17.1 C3.2 3253.94,4468.5 P6.2 3490,4338.86 3490,2335 3400,2245 R23.2
TCK: P1.1 U3.49 | length 1321.7
  Top Layer w10: P1.1 1546.49,1819.65 1546.49,1891.54 1659.95,2005 1759.95,2005 2242.59,2487.64 U3.49
TDI: P1.9 U3.50 | length 1183.1
  Top Layer w10: v1(1945,2075) 1945,2140.91 2272.04,2467.95 U3.50
  Bottom Layer w10: v1(1945,2075) 1846.49,1976.49 1846.49,1851.77 1874.61,1823.65 1917.03,1823.65 1969.03,1771.65 P1.9
TDO: P1.3 U3.55 | length 1089.3
  Top Layer w10: P1.3 1742.49,1819.65 1742.49,1912.94 1856.63,2027.09 1987.09,2027.09 2329.53,2369.53 U3.55
TMS: P1.5 U3.46 | length 1624.5
  Top Layer w10: v1(2140,2465) 2140,2605 2231.63,2696.63 2558.37,2696.63 2591.73,2663.27 U3.46
  Bottom Layer w10: P1.5 1794.49,1803.77 1746.49,1851.77 1746.49,1951.49 2115,2320 2115,2440 v1(2140,2465)
U5RX: U3.54 U10.12 | length 1292.9
  Top Layer w10: v1(2351,2399) 2351,2390 2353,2388 2354.21,2389.21 U3.54 ; v1(2820,2795) 2860,2835 2860,3135 2884.33,3159.33 U10.12
  Bottom Layer w10: v1(2351,2399) 2351,2501 2383,2533 2466,2533 2730,2797 2732,2795 v1(2820,2795)
U5TX: U3.53 U10.11 | length 1129.7
  Top Layer w10: v1(2395,2435) 2421.1,2408.9 U3.53 ; v1(2875,2750) 2878,2753 2878,3088 2899.33,3109.33 U10.11
  Bottom Layer w10: v1(2395,2435) 2423,2435 2739,2751 2740,2750 v1(2875,2750)
pads on no net: U1.1 U1.8 U3.2 U3.8 U3.9 U3.10 U3.11 U3.14 U3.17 U3.20 U3.21 U3.29 U3.30 U3.33 U3.34 U3.35 U3.36 U3.37 U3.38 U3.39 U3.40 U3.51 U3.52 U3.57 U3.58 U3.59 U3.61 U3.62 U6.6 U10.7 U10.8 U10.9 U10.10

## Keep-outs
Keep-Out Layer:
  the board outline again, w10

## Other copper
Top Layer:
  region net MOT_1: 1055.21,4395.47 1344.21,4395.47 1464.21,4250.47 1464.21,3600.47 869.21,3600.47 869.21,4075.47 873.21,4080.47 949.21,4146.47 1055.21,4237.47
  region net MOT_2: 1685.21,4395.47 1974.21,4395.47 2094.21,4250.47 2094.21,3600.47 1499.21,3600.47 1499.21,4075.47 1503.21,4080.47 1579.21,4146.47 1685.21,4237.47
  region net 24V: 2024.21,4500.47 704.21,4500.47 654.21,4550.47 654.21,5140.47 2024.21,5140.47
  region net GND: 1059.21,3490.47 1528.21,3490.47 1528.21,3311.47 1689.21,3311.47 1689.21,3490.47 2112.21,3488.47 2112.21,2996.47 334.21,2995.47 334.21,5140.47 624.21,5140.47 624.21,4500.47 824.21,4300.47 822.21,3311.47 1059.21,3311.47
Bottom Layer:
  region net MOT_1: 1027.21,4081.47 1027.21,4584.47 2140.21,4583.47 2140.21,5048.47 2343.21,5048.47 2343.21,4275.47 1614.21,4275.47 1466.21,4274.47 1466.21,4081.47
  region net MOT_2: 2373.21,4245.47 1661.21,4244.47 1661.21,3935.47 2567.21,3935.47 2566.21,5048.47 2373.21,5048.47

## Silkscreen, mask and mechanical layers (free items; w line width, h text height)
Top Overlay:
  lines w10: 427.28,4812.99 427.28,4655.51 820.98,4655.51 820.98,4812.99 ; 624.13,4655.51 624.13,4812.99 ; 3051.18,3582.68 3169.29,3582.68 3208.66,3582.68 ; 3051.18,3976.38 3212.72,3976.38 ; 3051.18,4370.08 3208.66,4370.08 ; 3055.24,2716.54 3212.72,2716.54 ; 3055.24,2893.7 3212.72,2893.7 ; 3208.66,3188.98 3051.18,3188.98 3051.18,4763.78 3208.66,4763.78 ; 3212.72,2500 3055.24,2500 3055.24,3090.55 3212.72,3090.55
  text "DIAPRO KFT" at 35,4805 h62.99 r270
  text "MOTOR" at 2204.72,4724.41 h62.99
  text "24V" at 645,4700 h59.06
  text "GND" at 448.58,4698.51 h59.06
  text "MOTOR CONTROL v1" at 205,4655 h62.99 r270
  text "SW1" at 3090.55,4645.67 h62.99 r270
  text "+" at 2224.41,4625.98 h78.74
  text "-" at 2421.26,4625.98 h78.74
  text "MOTOR" at 2204.72,4251.97 h62.99
  text "SW2" at 3090.55,4251.97 h62.99 r270
  text "+" at 2224.41,4153.54 h78.74
  text "-" at 2421.26,4153.54 h78.74
  text "www.diapro.hu" at 40,4150 h62.99 r270
  text "SW3" at 3090.55,3858.27 h62.99 r270
  text "SW4" at 3090.55,3464.57 h62.99 r270
  text "TX" at 3078.55,3049.57 h62.99 r270
  text "RX" at 3072.55,2861.57 h62.99 r270
  text "GND" at 3090.55,2696.85 h62.99 r270